# EAGLE board fan_board (EAGLE 5.11)
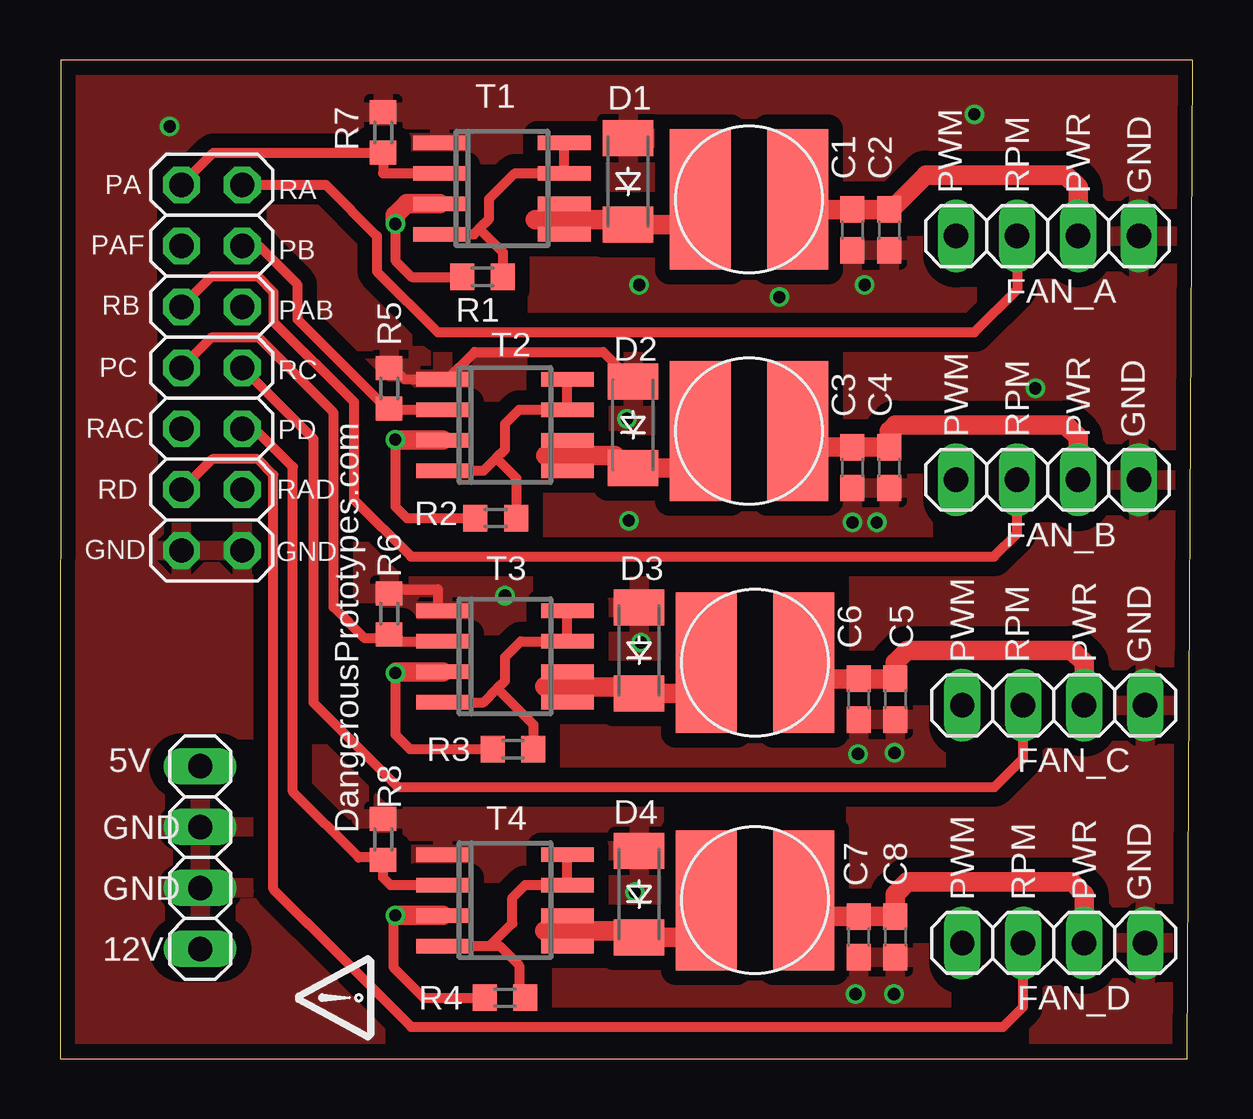
[diagram p0: board, top side]
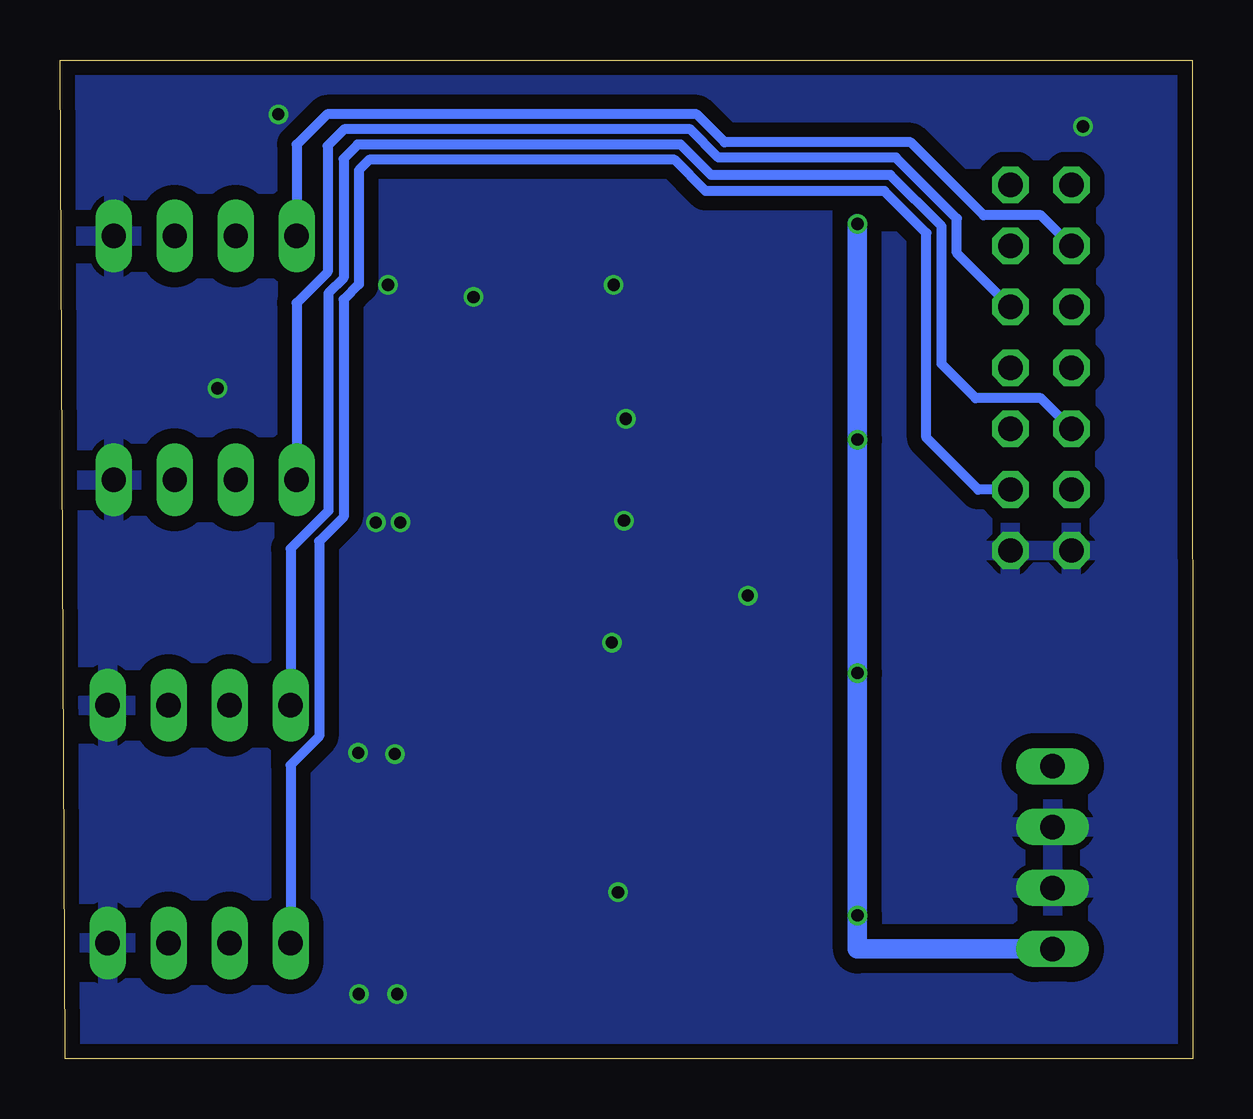
[diagram p1: board, bottom side, seen from below]

Size 47.2 x 41.63 mm. Coordinates in mm from the lower left corner, seen from the top.
Outline: 0,0 46.97,0 47.2,41.63 0.03,41.63 0,0
Copper layers (1*16): Top 0.035mm / dielectric 1.5mm / Bottom 0.035mm
Design rules "Fusion_eagle_rule_v1.1 *": minimum track width 6mil, minimum drill 12mil, track to track 8mil, track to pad 8mil, pad to pad 8mil, via to via 8mil, smd to smd 8mil, copper to edge 10mil, drill to drill 10mil, minimum pad ring 10mil, minimum via ring 6mil, stop-mask expansion 2mil, vias tented up to drill 100mil, thermal gap 10mil

## Footprints (pad centres in the part's own frame; a part is rotated, then mirrored left to right if it is on the bottom)
1X04 = drill 1.016 long: 1 -3.81,0; 2 -1.27,0; 3 1.27,0; 4 3.81,0
C603 = smd 1.1 x 1: 1 -0.85,0; 2 0.85,0
SOD-123_MINI-SMA = smd 1.5 x 2.1: A 1.8,0; C -1.8,0
2X07 = drill 1.016 octagon: 1 -7.62,-1.27; 2 -7.62,1.27; 3 -5.08,-1.27; 4 -5.08,1.27; 5 -2.54,-1.27; 6 -2.54,1.27; 7 0,-1.27; 8 0,1.27; 9 2.54,-1.27; 10 2.54,1.27; 11 5.08,-1.27; 12 5.08,1.27; 13 7.62,-1.27; 14 7.62,1.27
L5863 = smd 5.842 x 2.54: P$1 0,2.032; P$2 0,-2.032
R603 = smd 1 x 1.1: 1 -0.85,0; 2 0.85,0
SO08 = smd 0.6 x 2.2: 1 -1.905,-2.6; 2 -0.635,-2.6; 3 0.635,-2.6; 4 1.905,-2.6; 5 1.905,2.6; 6 0.635,2.6; 7 -0.635,2.6; 8 -1.905,2.6

## Placement (x,y rotation side)
3/4_PIN_FAN_A  [1X04]  41.15,34.29 0 top
3/4_PIN_FAN_B  [1X04]  41.15,24.13 0 top
3/4_PIN_FAN_C  [1X04]  41.4,14.73 0 top
3/4_PIN_FAN_D  [1X04]  41.4,4.83 0 top
C1  10u  [C603]  33.02,34.54 270 top
C2  10u  [C603]  34.54,34.54 270 top
C3  10u  [C603]  33.02,24.64 270 top
C4  10u  [C603]  34.54,24.64 270 top
C5  10u  [C603]  34.8,14.99 270 top
C6  10u  [C603]  33.27,14.99 270 top
C7  10u  [C603]  33.27,5.08 270 top
C8  10u  [C603]  34.8,5.08 270 top
D1  1N5813  [SOD-123_MINI-SMA]  23.67,36.58 90 top
D2  1N5813  [SOD-123_MINI-SMA]  23.88,26.42 90 top
D3  1N5813  [SOD-123_MINI-SMA]  24.13,17.02 90 top
D4  1N5813  [SOD-123_MINI-SMA]  24.13,6.86 90 top
JP1  [2X07]  6.32,28.8 270 top
JP8  [1X04]  5.84,8.38 270 top
L1  10uH  [L5863]  28.7,35.81 90 top
L2  10uH  [L5863]  28.7,26.16 90 top
L3  10uH  [L5863]  28.96,16.51 90 top
L4  10uH  [L5863]  28.96,6.6 90 top
R1  [R603]  17.6,32.59 180 top
R2  [R603]  18.16,22.53 180 top
R3  [R603]  18.87,12.9 180 top
R4  [R603]  18.54,2.54 180 top
R5  [R603]  13.72,27.94 90 top
R6  [R603]  13.72,18.54 90 top
R7  [R603]  13.46,38.61 90 top
R8  [R603]  13.46,9.14 90 top
T1  SI4532DY  [SO08]  18.41,36.27 270 top
T2  SI4532DY  [SO08]  18.54,26.42 270 top
T3  SI4532DY  [SO08]  18.54,6.6 270 top
T4  SI4532DY  [SO08]  18.54,16.76 270 top
U$1  DINA4_L  [DP_LOGO]  12.45,2.54 90 top

## Library data of the parts
3/4_PIN_FAN_A 3/4_PIN_FAN_B 3/4_PIN_FAN_C 3/4_PIN_FAN_D JP1 JP8 = pinhead
C1-C8 R1-R8 = dp_devices
D1-D4 L1-L4 T1-T4 = fica2
U$1 = dp_devices; URL2: DangerousPrototypes.com

## Nets
5V: JP8.1
12V: JP8.4 R1.2 R2.2 R3.2 R4.2 T1.3 T2.3 T3.3 T4.3
DR_A: D1.C L1.P$1 T1.5 T1.6
DR_B: D2.C L2.P$1 T2.5 T2.6
DR_C: D3.C L3.P$1 T4.5 T4.6
DR_D: D4.C L4.P$1 T3.5 T3.6
F_RPM_A: 3/4_PIN_FAN_A.2 JP1.2
F_RPM_B: 3/4_PIN_FAN_B.2 JP1.5
F_RPM_C: 3/4_PIN_FAN_C.2 JP1.8
F_RPM_D: 3/4_PIN_FAN_D.2 JP1.11
FAN_A: 3/4_PIN_FAN_A.3 C1.1 C2.1 L1.P$2
FAN_B: 3/4_PIN_FAN_B.3 C3.1 C4.1 L2.P$2
FAN_C: 3/4_PIN_FAN_C.3 C5.1 C6.1 L3.P$2
FAN_D: 3/4_PIN_FAN_D.3 C7.1 C8.1 L4.P$2
GND: 3/4_PIN_FAN_A.4 3/4_PIN_FAN_B.4 3/4_PIN_FAN_C.4 3/4_PIN_FAN_D.4 C1.2 C2.2 C3.2 C4.2 C5.2 C6.2 C7.2 C8.2 D1.A D2.A D3.A D4.A JP1.13 JP1.14 JP8.2 JP8.3 R5.2 R6.2 R7.2 R8.2 T1.1 T2.1 T3.1 T4.1
N$1: R1.1 T1.4 T1.7 T1.8
N$2: R2.1 T2.4 T2.7 T2.8
N$4: R3.1 T4.4 T4.7 T4.8
N$5: R4.1 T3.4 T3.7 T3.8
PWM_A: JP1.1 R7.1 T1.2
PWM_AF: 3/4_PIN_FAN_A.1 JP1.3
PWM_B: JP1.4 R5.1 T2.2
PWM_BF: 3/4_PIN_FAN_B.1 JP1.6
PWM_C: JP1.7 R6.1 T4.2
PWM_CF: 3/4_PIN_FAN_C.1 JP1.9
PWM_D: JP1.10 R8.1 T3.2
PWM_DF: 3/4_PIN_FAN_D.1 JP1.12

## Tracks (layer width: path | path; a pad name or v marks a point on that pad's centre or on a via)
12V  (via drill 0.51)
  Top 0.406: R1.2 14.66,32.59 13.97,33.27 v13.97,34.8 | R2.2 14.45,22.53 13.97,23.01 v13.97,25.81 | R3.2 14.58,12.9 13.97,13.51 v13.97,16.08 | R4.2 15.16,2.54 13.89,3.81 13.89,5.89 v13.97,5.97
  Top 0.813: v13.97,34.8 13.97,35.15 14.45,35.64 T1.3 | T2.3 13.99,25.78 v13.97,25.81 | T4.3 14.02,16.13 v13.97,16.08 | v13.97,5.97 T3.3
  Bottom 0.813: JP8.4 13.97,4.57 13.97,5.05 v13.97,5.97 v13.97,16.08 v13.97,25.81 v13.97,34.8
DR_A
  Top 0.406: T1.5 20.76,34.91 20.83,34.98 20.83,35.57 T1.6
  Top 0.813: 26.9,37.61 27.43,37.08 27.43,36.32 L1.P$1 26.7,35.79 26.7,34.75 26.67,34.78 D1.C 23.26,34.78 23.06,34.98 20.83,34.98 19.81,34.98
DR_B
  Top 0.406: T2.6 20.89,25.21 20.95,25.15 | T2.5 20.89,25.09 20.83,25.15
  Top 0.813: 26.65,27.71 26.67,27.69 L2.P$1 26.92,25.91 26.92,24.64 26.9,24.62 D2.C 23.64,24.62 23.11,25.15 20.95,25.15 20.83,25.15 20.24,25.15 20.73,25.12
DR_C
  Top 0.406: T4.6 21.14,15.54 21.18,15.49 21.18,14.9 T4.5
  Top 0.813: 26.65,18.06 26.92,17.78 L3.P$1 26.92,15.49 26.65,15.22 D3.C 23.9,15.22 23.62,15.49 21.18,15.49 20.22,15.49 20.19,15.52
DR_D
  Top 0.406: 20.19,5.33 20.51,5.33 T3.6 | T3.5 21.14,5.27 21.08,5.33
  Top 0.813: 26.39,8.4 26.42,8.38 26.42,7.11 L4.P$1 26.92,5.08 26.9,5.06 D4.C 23.64,5.06 23.37,5.33 21.08,5.33 20.19,5.33
F_RPM_A
  Top 0.406: 3/4_PIN_FAN_A.2 39.9,34.27 39.9,32.08 38.1,30.28 15.75,30.28 13.21,32.82 13.21,34.29 11.07,36.42 JP1.2
F_RPM_B
  Top 0.406: 3/4_PIN_FAN_B.2 39.88,21.89 38.91,20.93 14.63,20.93 12.24,23.32 12.24,27.38 8.89,30.73 8.89,31.95 8.23,32.61 6.33,32.61 JP1.5
F_RPM_C
  Top 0.406: 3/4_PIN_FAN_C.2 40.13,12.52 38.94,11.33 14.07,11.33 10.57,14.83 10.57,25.83 JP1.8
F_RPM_D
  Top 0.406: 3/4_PIN_FAN_D.2 40.13,2.16 39.29,1.32 14.63,1.32 10.34,5.61 10.29,5.66 8.89,7.06 8.89,24.33 8.23,24.99 6.35,24.99 5.08,23.72 JP1.11
FAN_A
  Top 0.813: L1.P$2 31.15,35.39 C1.1 C2.1 34.63,35.39 36.07,36.83 41.91,36.83 42.42,36.32 3/4_PIN_FAN_A.3
FAN_B
  Top 0.813: L2.P$2 31.41,25.49 C3.1 C4.1 34.54,26.16 34.8,26.42 41.91,26.42 42.42,25.91 3/4_PIN_FAN_B.3
FAN_C
  Top 0.813: L3.P$2 31.66,15.84 C6.1 C5.1 34.8,16.51 35.31,17.02 42.16,17.02 42.67,16.51 3/4_PIN_FAN_C.3
FAN_D
  Top 0.813: L4.P$2 31.66,5.93 C7.1 C8.1 34.8,6.86 35.31,7.37 42.16,7.37 42.67,6.86 3/4_PIN_FAN_D.3
GND  (via drill 0.51)
  Top 0.406: D2.A 22.63,29.46 17.27,29.46 16.13,28.32 T2.1 14.35,28.32 13.88,28.79 R5.2 | R6.2 13.8,19.39 13.97,19.56 15.75,19.56 15.75,18.86 T4.1
  other vias: 4.57,38.86 38.1,39.37 24.13,32.26 29.97,31.75 40.64,27.94 23.7,22.43 33.02,22.35 34.04,22.35 33.53,32.26 33.25,12.7 34.77,12.75 33.15,2.69 34.75,2.69 18.54,19.3 24.21,17.35 23.95,6.93 23.62,26.67
  pour Bottom (isolate 0.61): 0,0 46.99,0 46.99,41.15 0,41.15
  pour Top (isolate 0.61): 0,0 46.99,0 47.24,41.91 0,41.66
N$1
  Top 0.406: T1.8 T1.7 18.95,36.91 17.88,35.84 17.88,35 17.48,34.59 | 17.48,34.59 17.25,34.37 T1.4 | R1.1 18.45,33.62 17.48,34.59
N$2
  Top 0.406: T2.4 17.02,24.51 | 17.02,24.51 17.65,24.51 18.17,25.03 | 18.17,25.03 18.54,25.4 18.54,26.47 19.13,27.05 T2.7 T2.8 | 17.02,24.51 16.95,24.45 | R2.1 19.01,24.19 18.17,25.03
N$4
  Top 0.406: T4.4 17.02,14.86 | 17.02,14.86 17.65,14.86 18.22,15.43 | 18.22,15.43 18.54,15.75 18.54,16.74 19.2,17.4 T4.7 T4.8 | 17.02,14.86 17,14.85 | R3.1 19.72,13.93 18.22,15.43
N$5
  Top 0.406: T3.4 17.91,4.7 | 17.91,4.7 18.85,5.64 18.85,6.71 19.38,7.24 T3.7 T3.8 | 17.91,4.7 18.31,4.7 19.13,3.89 19.13,2.81 R4.1
PWM_A
  Top 0.406: T1.2 13.46,36.91 R7.1 6.39,37.76 JP1.1
PWM_AF
  Bottom 0.406: 3/4_PIN_FAN_A.1 37.34,38.1 36.07,39.37 20.68,39.37 19.51,38.2 11.76,38.2 8.71,35.15 6.33,35.15 JP1.3
PWM_B
  Top 0.406: T2.2 13.76,27.05 R5.1 13.35,27.46 13.26,27.46 9.91,30.81 9.91,32.26 8.28,33.88 JP1.4
PWM_BF
  Bottom 0.406: 3/4_PIN_FAN_B.1 37.34,31.5 36.04,32.79 36.04,38.05 35.36,38.73 20.93,38.73 19.76,37.57 12.37,37.57 9.83,35.03 9.83,33.58 JP1.6
PWM_C
  Top 0.406: 5.05,28.83 JP1.7 6.3,30.05 8.28,30.05 11.4,26.92 11.4,18.82 12.7,17.53 13.72,17.53 | 14.22,17.4 14.02,17.4 | 14.22,17.4 T4.2 | 13.72,17.53 14.1,17.53 14.22,17.4 | 13.72,17.53 R6.1
PWM_CF
  Bottom 0.406: 3/4_PIN_FAN_C.1 37.59,21.26 36.02,22.83 36.02,31.9 35.38,32.54 35.38,37.52 34.8,38.1 21.34,38.1 20.07,36.83 12.6,36.83 10.46,34.7 10.46,28.96 9.04,27.53 6.33,27.53 JP1.9
PWM_D
  Top 0.406: JP1.10 8.1,26.26 9.7,24.66 9.7,11.12 12.45,8.38 13.37,8.38 R8.1 13.46,7.54 13.77,7.24 T3.2
PWM_DF
  Bottom 0.406: 3/4_PIN_FAN_D.1 37.59,12.24 36.4,13.44 36.4,21.56 35.38,22.58 35.38,31.65 34.75,32.28 34.75,37.03 34.31,37.47 21.59,37.47 20.3,36.17 12.85,36.17 11.1,34.42 11.1,25.88 8.94,23.72 JP1.12

## Text on the board
tNames: PA | RA | PWM | RPM | PWR | GND | PAF | PB | FAN_A | RB | PAB | PC | RC | RAC | PD | PWM | RPM | PWR | GND | RD | RAD | FAN_B | GND | GND | PWM | RPM | PWR | GND | 5V | FAN_C | DangerousPrototypes.com | GND | GND | PWM | RPM | PWR | GND | 12V | FAN_D